# Altium PCB OGS_Headstage_NORDIC_LED.PcbDoc
Units mil, origin at the board's own origin, x right, y up, seen from the top; angles counter-clockwise.
Board outline 461.66 x 344.04 mil, 4 copper layers (Top Layer, Ground 1, Power, Bottom Layer), stack 33.1 mil thick; 22 components, 22 nets, 84 pads, 18 vias.
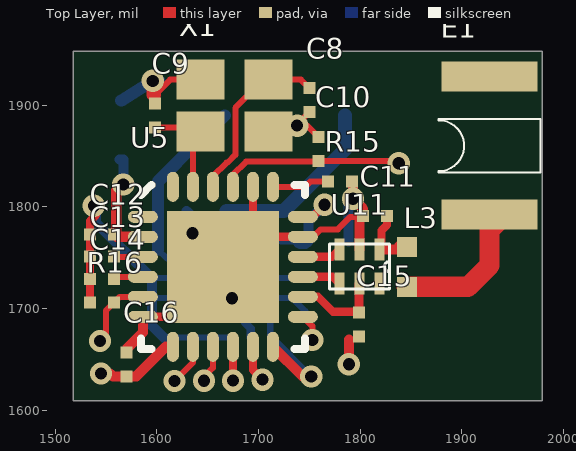
[diagram p0: Top Layer view]
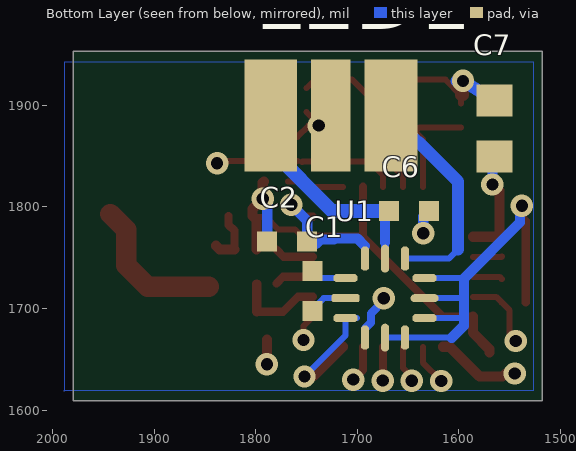
[diagram p1: Bottom Layer view, seen from below]
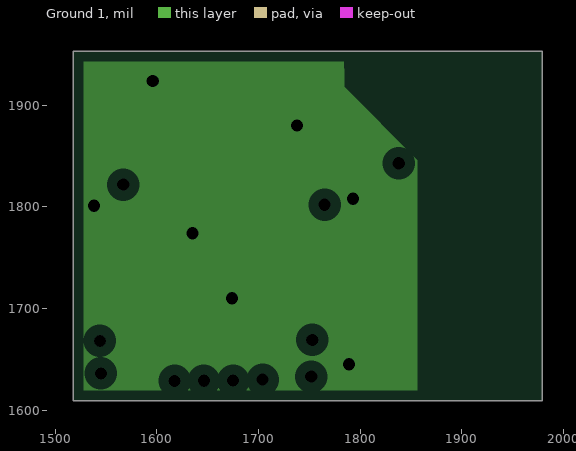
[diagram p2: Ground 1, clearances drawn from the general rule]
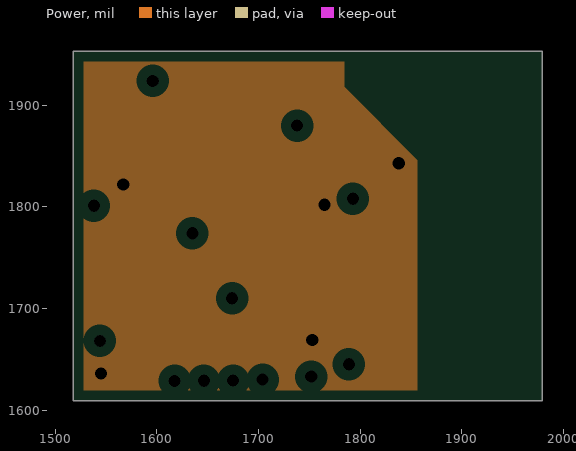
[diagram p3: Power, clearances drawn from the general rule]

## Layer stack, top to bottom
Top Layer: signal copper 2.1
Dielectric: core 3.5, FR-4, Dk 4.8
Ground 1: plane copper 1.4, net GND
Dielectric: prepreg 10, FR-4, Dk 4.8
Power: plane copper 1.4, net V3P0
Dielectric: core 12.6, FR-4, Dk 4.8
Bottom Layer: signal copper 2.1

## Board outline
1517.8,1609.01 1517.8,1953.05 1979.46,1953.05 1979.46,1609.01

## Design rules (kind name [scope] priority, off if disabled: settings)
Clearance clearance1 [All] p1: gap=6
ComponentClearance [All] p1: gap=6 collisioncheckmode=3 verticalgap=0 showdistances=TRUE
Height [All] p1 off: minheight=0 maxheight=1000 prefheight=500
HoleSize [All] p1: absolutevalues=TRUE maxlimit=100 minlimit=10 maxpercent=80.000 minpercent=20.000
HoleToHoleClearance [All] p1: gap=6 allowstackedmicrovias=TRUE
MinimumSolderMaskSliver [All] p1: minsoldermaskwidth=3
PlaneClearance [All] p1: clearance=10
PlaneConnect [All] p1: planeconnectstyle=Direct reliefexpansion=20 reliefentries=4 reliefconductorwidth=10 reliefairgap=10
PolygonConnect PowerConnect [All vs Not OnOutside] p1: connectstyle=Direct reliefconductorwidth=10 reliefentries=4 polygonreliefangle="90 Angle"
PolygonConnect [All] p2: connectstyle=Relief reliefconductorwidth=10 reliefentries=4 polygonreliefangle="90 Angle"
RoomDefinition Main_4x4 [InComponentClass('Main_4x4')] p1 off: confinementstyle=ConfineIn formatcopy=TRUE lockcomponents=FALSE outline 0,0 2000,0 2000,1000 0,1000
RoomDefinition LED_SOP [InComponentClass('LED_SOP')] p2 off: confinementstyle=ConfineIn formatcopy=TRUE lockcomponents=FALSE outline 2666,913 2951,913 2951,1048 2666,1048
RoutingCorners [All] p1: cornerstyle=45-Degree minsetback=20 maxsetback=20
RoutingVias [All] p1: holewidth=12 width=22 viastyle="Through Hole" minholewidth=12 minwidth=22 maxholewidth=30 maxwidth=50
SilkscreenOverComponentPads [OnLayer('Mechanical 13') vs OnLayer('Mechanical 15')] p1: minsilkscreentomaskgap=10
SolderMaskExpansion [All] p1: expansion=0
Width Width_v3p0 [InNet('V3P0')] p1: maxlimit=50 minlimit=6 preferedwidth=10
Width [All] p2: maxlimit=30 minlimit=6 preferedwidth=6
19 further rules are at their usual default settings.

## Classes and differential pairs
component class Main_4x4: C7 C8 C9 C10 C11 C12 C13 C14 C15 C16 C? E1 L3 R15 R16 U5 U11 X1
component class LED_SOP: C1 C2 C6 LED1 U1

## Components (designator, comment, footprint, x,y, rotation, side; value= is the part's Value field where it differs from the comment)
C1 "NP0 50V" 0402l 1744,1717 r270 bottom
C2 "NP0 50V" 0402l 1769,1766 r180 bottom
C6 "NP0 50V" 0402l 1649,1796 r180 bottom
C7 "NP0 50V" 1608[0603] 1565,1877 r90 bottom
C8 "NP0 50V" 0201 1750,1905 r90 top
C9 "NP0 50V" 0201 1598,1890 r90 top
C10 "NP0 50V" 0201 1759,1857 r90 top
C11 "NP0 50V" 0201 1814.81,1791 r0 top
C12 "NP0 50V" 0201 1546,1773 r180 top
C13 "NP0 50V" 0201 1546,1751 r0 top
C14 "NP0 50V" 0201 1546,1729 r180 top
C15 "NP0 50V" 0201 1799,1684 r270 top
C16 "NP0 50V" 0201 1570,1645 r270 top
E1 "MicroAntenna" microantenna 1927.45,1792.23 r90 top
L3 "Inductor" 0402l 1846,1741 r270 top
LED1 "osram_hiled" osram_led_cn5m 1726,1890 r0 bottom
R15 "Res2" 0201 1780,1825 r0 top
R16 "Res2" 0201 1546,1706 r0 top
U1 "ZLED7022" 12utqfn 1653,1749 r270 bottom
U5 "QFN24 4x4 package" NORDIC_QFN50P400X400X90-25N 1665,1741 r0 top
U11 "balun" balun 1819,1758 r270 top
X1 "TSX-3225, 16MHz, Cl=9pF, +/-10ppm" "bt-xtal 2.5 x 2 mm" 1643,1874 r0 top

## Footprints (in the part's own frame and the unit in brackets; to place one, negate y for a bottom-side part, rotate by r counter-clockwise, add the part's x,y. Pads: shape width x height; smd on the part's side, far side on the other; paste and mask are expansions set on the pad)
12utqfn [mm]
  oct 0.6x0.2 smd: 1(0,0) 3(0,-1) 7(1.975,-1) 9(1.975,0)
  oval 0.7x0.2 smd: 2(0,-0.5) 8(1.975,-0.5)
  oct 0.2x0.6 smd: 4(0.487,-1.487) 6(1.487,-1.487) 10(1.487,0.487) 12(0.487,0.487)
  rrect50% 0.2x0.7 smd: 5(0.987,-1.487)
  oval 0.2x0.7 smd: 11(0.987,0.487)
  body extent -0.04,-1.53 2.01,0.52, height 0.6
0201 [mm]
  rect 0.3x0.3 smd: 1(-0.3,0) 2(0.3,0)
  body extent -0.3,-0.15 0.3,0.15, height 0.3
0402l [mm]
  rect 0.5x0.5 smd: 1(-0.5,0) 2(0.5,0)
  body extent -0.5,-0.25 0.5,0.25, height 0.3
1608[0603] [mm] "Chip Capacitor, Body 1.6x0.8mm, IPC High Density"
  rect 0.8x0.9 smd: 1(-0.7,0) 2(0.7,0)
  body extent -0.87,-0.48 0.87,0.48, height 1.3
balun [mm]
  rect 0.55x0.25 smd: 1(0,0) 2(0,-0.5) 3(0,-1) 4(0.85,-1) 5(0.85,-0.5) 6(0.85,0)
  silkscreen extent -0.14,-1.25 0.99,0.25, body extent -0.14,-1.25 0.99,0.25, height 0.6
"bt-xtal 2.5 x 2 mm" [mm] "Mercury X32 series"
  rect 1.2x1 smd: 1(0,0) 2(1.7,0) 3(1.7,1.3) 4(0,1.3)
  body extent -0.4,-0.35 2.1,1.65, height 0.65
microantenna [mm]
  rect 0.75x2.4 smd: 1(0,0) 2(3.45,0)
  silkscreen extent 1.06,-1.27 2.39,1.27, body extent -0.2,-1.05 3.6,1.05, height 0.6
NORDIC_QFN50P400X400X90-25N [mm] "QFN24 4x4x0.85mm, 0.5mm pitch - Medium Density"
  oval 0.75x0.3 smd: 1(-2,1.25) 2(-2,0.75) 3(-2,0.25) 4(-2,-0.25) 5(-2,-0.75) 6(-2,-1.25) 13(2,-1.25) 14(2,-0.75) 15(2,-0.25) 16(2,0.25) 17(2,0.75) 18(2,1.25)
  oval 0.3x0.75 smd: 7(-1.25,-2) 8(-0.75,-2) 9(-0.25,-2) 10(0.25,-2) 11(0.75,-2) 12(1.25,-2) 19(1.25,2) 20(0.75,2) 21(0.25,2) 22(-0.25,2) 23(-0.75,2) 24(-1.25,2)
  rect 2.8x2.8 smd: 25(0,0)
  silkscreen extent -2.05,-2.05 2.05,2.05, body extent -2.05,-2.05 2.05,2.05, height 0.9
osram_led_cn5m [mil]
  rect 52x110 smd: 1(-59.25,0) 2(59.25,0)
  rect 39x110 smd: ""(0,0)

## Part data
C1 C2 C6 C7 C8 C9 C10 C11 C12 C13 C14 C15 C16: library part Cap, "Capacitor"
R15 R16: "Resistor"
U1: "ZLED 7022"
U5: library part "nRF24LE1 - 4x4", "2.4GHz Tranceiver with embedded MCU and 10 bit ADC"
X1: library part BT-XTAL, "Crystal"

## Via types
v1: diameter 22, hole 12, Top Layer to Bottom Layer, 18 vias

## Nets (pads, with @x,y where several pads share a name; then routed paths per layer and width w, separated by ;. In a path a pad name is that pad's centre, name@x,y a point inside that pad or via, vN(x,y) a via of type N, cw(c..) or ccw(c..) an arc to the next point about the centre after c; other vN are vias at no path point)
ADC+: U5.9 | length 37.1
  Top Layer w6: v1(1646.36,1628.85) 1646.36,1632.67 1655.16,1641.47 U5.9
ADC-: U5.8 | length 41.1
  Top Layer w6: v1(1617.4,1628.63) 1635.47,1646.69 U5.8
FCSN: U5.11 | length 36.2
  Top Layer w8: U5.11 1694.53,1639.47 v1(1704,1630)
FMISO: U5.10 | length 33.3
  Top Layer w8: U5.10 1674.84,1629.16 v1(1675,1629)
GND: C2.1 C6.2 C7.2 C8.1 C9.2 C10.2 C11.1 C12.2 C13.1 C14.2 C15.2 C16.1 R15.2 R16.1 U1.7 U1.8 U1.9 U1.10 U1.11 U1.12 U5.6 U5.17 U5.20 U5.25 U11.2 X1.2 X1.4 | length 1189.6
  Top Layer w6: C9.2 1598,1910 1613.18,1925.18 X1.4 ; X1.2 1730.81,1874 C8.1 ; v1(1738,1880) 1747.81,1880 C10.2 ; U5.17 1753.99,1770.53 1761.29,1777.83 1778.02,1777.83 1790.32,1790.13 1802.13,1790.13 C11.1
  Top Layer w8: R16.1 C14.2 C13.1 C12.2 1534.19,1786.19 1540,1792 1538,1794 v1(1538,1801) ; U5.6 1615.79,1691.79 U5.25 U5.25@1694.53,1770.53 ; U5.20 U5.25@1694.53,1770.53 ; U5.17 U5.25@1694.53,1770.53
  Top Layer w10: C16.1 1570,1660 1586.26,1676.26 U5.6 ; v1(1789,1645) 1789,1669.19 ; R15.2 1793,1823.81 v1(1793,1808) 1803,1798 C11.1 ; U11.2 1799.32,1787.32 C11.1@1802.13,1790.13
  Top Layer w12: v1(1596,1924) 1596,1910 1598,1910
  Bottom Layer w6: 1594.81,1729.81 1595.12,1729.81 U1.12 ; 1595.12,1710.12 U1.11 ; 1596,1690.44 U1.10 ; 1607,1671.24 U1.9 U1.8
  Bottom Layer w8: v1(1674,1710) 1674,1707.65 1686.62,1695.02 1686.62,1685.99 1692.37,1680.25 U1.7
  Bottom Layer w10: v1(1538,1801) 1540,1799 1540,1784.61 1594.81,1729.81 ; 1595.12,1730.12 1595.12,1729.81 1595.12,1710.12 1595.12,1683 1595.24,1683 1607,1671.24 ; C6.2 1635,1790.32 v1(1635,1774) ; C2.1 1788.68,1803.68 v1(1793,1808)
  Bottom Layer w12: C7.2 v1(1596,1924) v1@1602.49,1924
LED_CTRL: U1.6 U5.12 | length 135.1
  Top Layer w10: U5.12 1743.47,1633 v1(1752,1633)
  Bottom Layer w6: U1.6@1700.56,1690.44 U1.6 1711.56,1673.44 v1(1752,1633)
NetC1_1: C1.1 U1.4 | length 34.4
  Bottom Layer w6: U1.4 C1.1@1746,1729.81
NetC1_2: C1.2 U1.5 | length 39.7
  Bottom Layer w6: U1.5 1733.19,1710.12 C1.2@1746,1697.32
NetC8_2: C8.2 U5.22 X1.3 | length 175
  Top Layer w6: U5.22 1655.16,1829.99 1668.67,1843.5 1669.5,1843.5 1677.31,1851.31 1677.31,1897.41 1705.08,1925.18 X1.3 1741.63,1925.18 C8.2
NetC9_1: C9.1 U5.23 X1.1 | length 104.1
  Top Layer w6: C9.1 1638.81,1878.19 X1.1 1635.47,1866.47 U5.23
NetC11_2: C11.2 L3.1 U11.1 | length 54.9
  Top Layer w8: U11.1@1821,1758 1821,1776.62 1826.62,1782.24 C11.2
  Top Layer w10: U11.1@1821,1758 1835.32,1758 L3.1@1839,1761.68
NetC13_2: C13.2 U5.3 | length 28.5
  Top Layer w6: C13.2 1557.97,1750.84 U5.3
NetC14_1: C14.1 U5.4 | length 29.3
  Top Layer w6: C14.1 1559.97,1731.16 U5.4
NetC15_1: C15.1 U5.14 U11.5 | length 88.7
  Top Layer w8: U5.14 1758.53,1711.47 1773.19,1696.81 C15.1@1799,1696.81
  Top Layer w9: C15.1@1799,1696.81 U11.5@1799,1724.22
NetE1_1: E1.1 L3.2 | length 147.2
  Top Layer w20: L3.2 1906.32,1721.32 1927.45,1742.45 1927.45,1777.45 E1.1@1943,1793
NetLED1_1: LED1.1 U1.1 | length 215.4
  Bottom Layer w6: 1601,1758 1610,1749 U1.1
  Bottom Layer w12: 1601,1758 1601,1825 1639.75,1863.75 1640.5,1863.75 LED1.1
NetR15_1: R15.1 U5.19 | length 56.2
  Top Layer w6: U5.19 1746,1819.74 1751.26,1825 R15.1
NetR16_2: R16.2 U5.5 | length 74.4
  Top Layer w6: v1(1544,1668) 1550,1674 1550,1698.19 R16.2 1563.28,1711.47 U5.5
NetU5_15: U5.15 U11.4 | length 38.6
  Top Layer w8: U5.15 1773.01,1731.16 U11.4
NetU5_16: U5.16 U11.3 | length 38.9
  Top Layer w8: U5.16 1772.47,1750.84 U11.3
V3P0: C2.2 C7.1 C10.1 C12.1 C16.2 U1.3 U5.2 U5.7 U5.13 U5.18 U5.21 | length 538.8
  Top Layer w6: U5.21 1674.84,1831.41 1687.94,1844.5 1753.68,1844.5 C10.1@1754.19,1844 ; U5.13 1753,1682.53 v1(1753,1669) ; C10.1 1835.81,1845.19 v1(1838,1843)
  Top Layer w8: v1@1566,1822 v1(1567,1822) ; U5.18 1753.21,1790.21 v1(1765,1802)
  Top Layer w10: v1(1545,1636) 1554,1636 1557,1633 1569.81,1633 C16.2 1579.81,1633.19 1608.88,1662.26 U5.7 ; v1@1566,1822 1560,1816 1560,1775.19 C12.1 1560.28,1770.53 U5.2
  Bottom Layer w6: U1.3 1692.37,1761.37 ; C2.2@1749.32,1763.32 C2.2@1749.78,1763.32
  Bottom Layer w10: C7.1@1563.51,1846.51 1567,1846.51 v1(1567,1822) ; 1692.37,1761.37 1700,1769 1721.82,1769 1722.82,1768 1736.07,1768 1740.76,1763.32 C2.2@1746,1763.32 ; C2.2 1749.32,1786.32 v1(1765,1802)
VOUT: C6.1 LED1.2 U1.2 | length 223.9
  Bottom Layer w8: U1.2 1672.68,1765
  Bottom Layer w10: C6.1 1672.68,1792 1672.68,1765
  Bottom Layer w14: C6.1 1724.88,1796 1785.25,1856.37 LED1.2
pads on no net: E1.2 LED1. U5.1 U5.24 U11.6

## Polygon pours and split planes (outlines as drawn)
no net on Top Layer "Top Layer-No Net" (solid, shelved, pour order 12): 1275.65,2067 1275.65,1248.45 1264,1237 2062.35,1237 2062.35,2055.55 2074,2067 1275.65,2067
no net on Bottom Layer "Top Layer-No Net" (solid, shelved, pour order 14): 1278,2068 1278,1235 1279.05,1234 2079.95,1234 2081,1233 2081,2063.01 1282.2,2063.01 1279.05,2066
GND on Bottom Layer "Bottom-GND" (solid, shelved, pour order 4): 1527,1943 1527,1619 1989,1619 1988,1619 1988,1943
V3P0 on Power (split plane): 1785,1918 1857,1846 1857,1619.1 1527.88,1619.1 1527.88,1942.97 1785,1942.97
GND on Ground 1 (split plane): 1785,1918 1857,1846 1857,1619.1 1527.88,1619.1 1527.88,1942.97 1784.46,1942.97

## Other copper
Ground 1 (plane layer: these items are gaps in the copper):
  pour cut-out: 1784.23,1953.69 1785,1918 1857,1846 1857,1609.81 2009.86,1608.81 2009.86,1952.77
Power (plane layer: these items are gaps in the copper):
  pour cut-out: 1785,1952.25 1785,1918 1857,1846 1857,1607.24 1978.83,1607.51 1977.11,1952.25

## Silkscreen, mask and mechanical layers (free items; w line width, h text height)
Mechanical 2:
  lines w60: 1496.99,1587.41 1496.99,1973.86 2002.66,1973.86 2002.66,1587.41 1496.99,1587.41